# EAGLE board i2c_lcd_v2 (EAGLE 5.10)
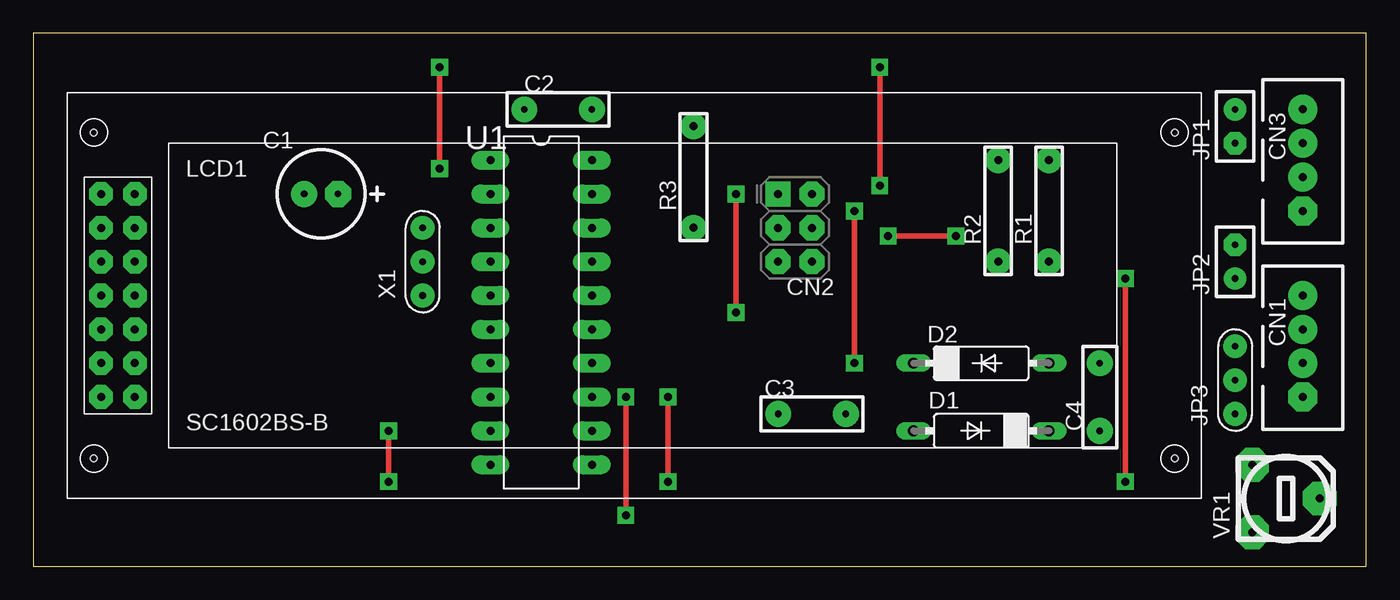
[diagram p0: board, top side]
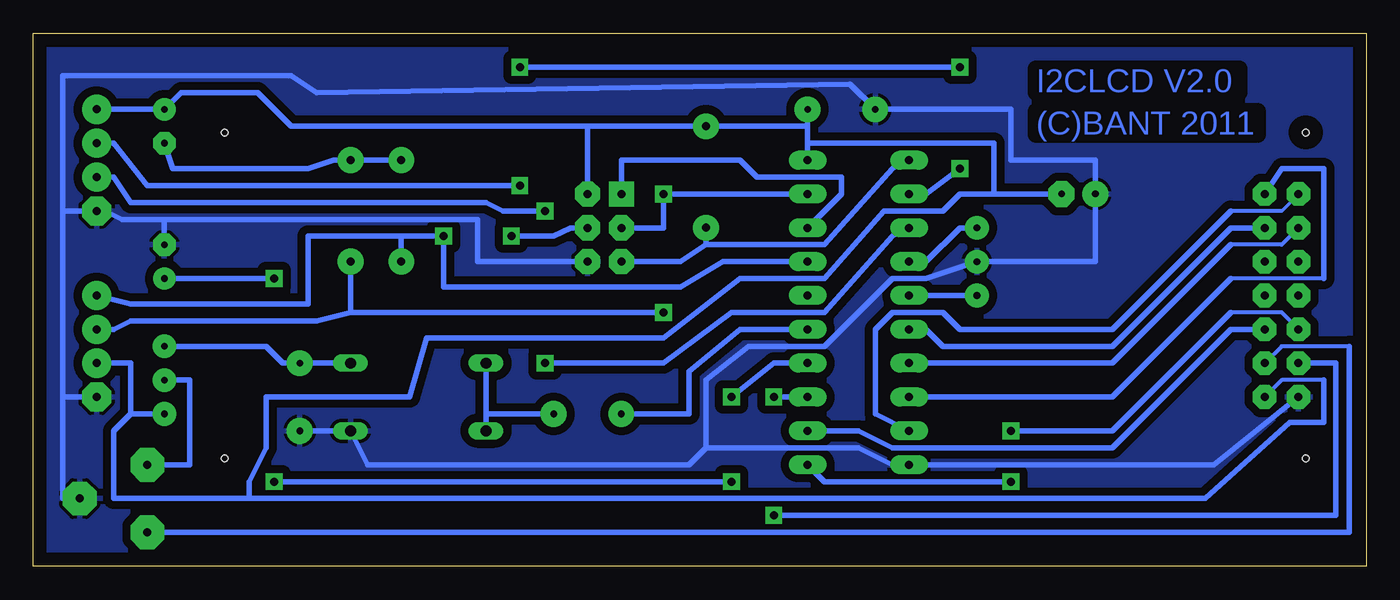
[diagram p1: board, bottom side, seen from below]

Size 100 x 40 mm. Coordinates in mm from the lower left corner, seen from the top.
Outline: 0,0 100,0 100,40 0,40 0,0
Copper layers (1*16): Top 0.035mm / dielectric 1.5mm / Bottom 0.035mm
Design rules "default": minimum track width 10mil, minimum drill 24mil, track to track 8mil, track to pad 8mil, pad to pad 8mil, via to via 8mil, smd to smd 8mil, copper to edge 40mil, drill to drill 8mil, minimum pad ring 10mil, minimum via ring 8mil, stop-mask expansion 4mil, vias tented up to drill 0mil, thermal gap 10mil

## Footprints (pad centres in the part's own frame; a part is rotated, then mirrored left to right if it is on the bottom)
CCAP_6.5 = drill 0.5 pad 1.93 octagon: + -1.27,0 | drill 0.5 pad 1.93 round: - 1.27,0
CAP_DIP_2 = drill 0.5 pad 1.93 round: 1 -2.54,0; 2 2.54,0
CON_HRS_DIP_4 = drill 0.6 pad 2.184 octagon: 1 -3.81,0 | drill 0.6 pad 2.184 round: 2 -1.27,0; 3 1.27,0; 4 3.81,0
2X3-NS = drill 0.6 pad 1.88 square: 1 -2.54,-1.27 | drill 0.6 pad 1.88 octagon: 2 -2.54,1.27; 3 0,-1.27; 4 0,1.27; 5 2.54,-1.27; 6 2.54,1.27
DO07 = drill 0.813 long: A 5.08,0; C -5.08,0
CON_PINHEAD_2 = drill 0.5 pad 1.676 octagon: 1 -1.27,0 | drill 0.5 pad 1.676 round: 2 1.27,0
CSTLS = drill 0.5 pad 1.778 round: 1 -2.54,0; 2 0,0; 3 2.54,0
SC1602 = drill 0.6 pad 1.778 octagon: DB0 -35.56,0; DB1 -38.1,0; DB2 -35.56,2.54; DB3 -38.1,2.54; DB4 -35.56,5.08; DB5 -38.1,5.08; DB6 -35.56,7.62; DB7 -38.1,7.62; E -38.1,-2.54; R/W -35.56,-2.54; RS -38.1,-5.08; VDD -35.56,-7.62; VO -35.56,-5.08; VSS -38.1,-7.62 | hole 0.5: -38.64,-12.24; -38.64,12.24; 42.45,12.24; 42.45,-12.24
R_0.125W_3 = drill 0.6 pad 1.93 round: 1 -3.81,0; 2 3.81,0
DIL20 = drill 0.6 pad 1.422 long: 1 -11.43,-3.81; 2 -8.89,-3.81; 3 -6.35,-3.81; 4 -3.81,-3.81; 5 -1.27,-3.81; 6 1.27,-3.81; 7 3.81,-3.81; 8 6.35,-3.81; 9 8.89,-3.81; 10 11.43,-3.81; 11 11.43,3.81; 12 8.89,3.81; 13 6.35,3.81; 14 3.81,3.81; 15 1.27,3.81; 16 -1.27,3.81; 17 -3.81,3.81; 18 -6.35,3.81; 19 -8.89,3.81; 20 -11.43,3.81
POT_MIDDLE = drill 0.6 pad 2.54 octagon: P$1 -2.54,-2.54; P$2 0,2.54; P$3 2.54,-2.54

## Placement (x,y rotation side)
C1  10uF  [CCAP_6.5]  21.59,27.94 180 top
C2  0.1uF  [CAP_DIP_2]  39.37,34.29 0 top
C3  0.1uF  [CAP_DIP_2]  58.42,11.43 180 top
C4  0.1uF  [CAP_DIP_2]  80.01,12.7 90 top
CN1  I2C  [CON_HRS_DIP_4]  95.25,16.51 90 top
CN2  AVR-ISP-6NS  [2X3-NS]  57.15,25.4 270 top
CN3  TTL  [CON_HRS_DIP_4]  95.25,30.48 90 top
D1  1S2076A  [DO07]  71.12,10.16 180 top
D2  1S2076A  [DO07]  71.12,15.24 0 top
JP1  [CON_PINHEAD_2]  90.17,33.02 90 top
JP2  [CON_PINHEAD_2]  90.17,22.86 270 top
JP3  [CSTLS]  90.17,13.97 90 top
LCD1  SC1602BS-B  [SC1602]  43.18,20.32 0 top
R1  10K  [R_0.125W_3]  76.2,26.67 90 top
R2  10K  [R_0.125W_3]  72.39,26.67 90 top
R3  10K  [R_0.125W_3]  49.53,29.21 90 top
U1  ATTINY2313  [DIL20]  38.1,19.05 270 top
VR1  10K  [POT_MIDDLE]  93.98,5.08 270 top
X1  8MHz  [CSTLS]  29.21,22.86 90 top

## Library data of the parts
C1-C4 CN1 CN3 JP1-JP3 R1-R3 VR1 X1 = MyLib
CN2 U1 = atmel
D1 D2 = diode
LCD1 = blank

## Nets
GND: C1.- C2.1 C4.1 CN1.1 CN2.6 CN3.1 D1.C JP2.1 LCD1.VSS U1.10 VR1.P$2 X1.2
N$1: LCD1.DB4 U1.6
N$2: LCD1.DB5 U1.7
N$3: LCD1.DB6 U1.8
N$4: LCD1.DB7 U1.9
N$5: LCD1.E U1.11
N$6: LCD1.R/W U1.12
N$7: LCD1.RS U1.13
N$8: CN2.5 R3.1 U1.1
N$9: CN1.3 CN2.3 R1.1 U1.19
N$10: CN1.4 CN2.4 R2.1 U1.17
N$11: JP1.1 R1.2 R2.2
N$12: LCD1.VO VR1.P$3
N$13: CN3.2 U1.3
N$14: CN3.3 U1.2
N$15: CN2.1 U1.18
N$16: JP2.2 U1.14
N$17: U1.4 X1.3
N$18: U1.5 X1.1
N$19: C3.1 D1.A D2.C
N$20: C4.2 D2.A JP3.3
N$21: C3.2 U1.15
N$22: JP3.2 VR1.P$1
VCC: C1.+ C2.2 CN1.2 CN2.2 CN3.4 JP1.2 JP3.1 LCD1.VDD R3.2 U1.20

## Tracks (layer width: path | path; a pad name or v marks a point on that pad's centre or on a via)
GND
  Bottom 0.406: 90.17,26.04 93.34,26.04 94.61,26.67 CN3.1 97.79,26.67 | C4.1 D1.C 74.93,7.62 50.8,7.62 49.53,8.89 | LCD1.VSS 11.43,7.62 U1.10 35.56,7.62 38.1,8.89 49.53,8.89 | 97.79,26.67 97.79,36.83 80.64,36.83 78.74,35.56 38.73,36.2 C2.1 26.67,34.29 26.67,30.48 20.32,30.48 C1.- 20.32,22.86 X1.2 33.02,21.59 35.56,21.59 40.64,16.51 46.35,16.51 49.53,13.97 49.53,8.89 | 97.79,26.67 97.79,12.7 | 97.79,12.7 97.79,5.08 VR1.P$2 | 97.79,12.7 CN1.1 | 90.17,26.04 JP2.1 | CN2.6 66.67,22.86 66.67,26.04 90.17,26.04
  pour Bottom (isolate 0.61): 0,39.37 0,0 100.33,0 100.33,40.64 0,40.64
N$1
  Bottom 0.406: U1.6 33.02,17.78 31.75,16.51 19.05,16.51 10.16,25.4 LCD1.DB4
N$2
  Bottom 0.305: 10.16,24.13 6.35,24.13 LCD1.DB5
  Bottom 0.406: U1.7 19.05,15.24 10.16,24.13
N$3
  Bottom 0.305: 3.17,21.59 10.16,21.59
  Bottom 0.406: U1.8 19.05,12.7 10.16,21.59 | 3.17,21.59 3.17,29.84 6.35,29.84 LCD1.DB6
N$4
  Bottom 0.254: 6.35,26.67 LCD1.DB7
  Bottom 0.305: 6.35,26.67 10.16,26.67
  Bottom 0.406: U1.9 36.83,11.43 36.83,17.78 35.56,19.05 31.75,19.05 30.48,17.78 19.05,17.78 10.16,26.67
N$5  (via drill 0.6 pad 1.27)
  Top 0.406: v26.67,10.16 v26.67,6.35
  Bottom 0.305: LCD1.E 6.35,19.05 10.16,19.05
  Bottom 0.406: 10.16,19.05 19.05,10.16 v26.67,10.16 | v26.67,6.35 40.64,6.35 U1.11
N$6
  Bottom 0.406: U1.12 38.1,10.16 35.56,8.89 19.05,8.89 10.16,17.78 LCD1.R/W
N$7  (via drill 0.6 pad 1.27)
  Top 0.406: v44.45,3.81 v44.45,12.7
  Bottom 0.406: LCD1.RS 2.29,15.24 2.29,3.81 v44.45,3.81 | v44.45,12.7 U1.13
N$8
  Bottom 0.406: U1.1 35.56,29.84 40.64,24.13 49.53,24.13 | 49.53,24.13 R3.1 | CN2.5 51.44,22.86 49.53,24.13
N$9  (via drill 0.6 pad 1.27)
  Top 0.406: v52.7,27.94 v52.7,19.05
  Bottom 0.406: U1.19 v52.7,27.94 52.7,25.4 CN2.3 | 76.2,19.05 78.74,18.41 92.71,18.41 93.98,17.78 CN1.3 | 76.2,19.05 R1.1 | v52.7,19.05 76.2,19.05
N$10  (via drill 0.6 pad 1.27)
  Top 0.406: v69.22,24.77 v64.14,24.77
  Bottom 0.406: U1.17 48.26,22.86 51.44,20.95 69.22,20.95 v69.22,24.77 72.39,24.77 | CN1.4 92.71,19.68 79.38,19.68 79.38,24.77 72.39,24.77 | 72.39,24.77 R2.1 | v64.14,24.77 60.96,24.77 59.69,25.4 CN2.4
N$11
  Bottom 0.406: JP1.1 89.53,29.84 79.38,29.84 77.47,30.48 R1.2 R2.2
N$12
  Bottom 0.305: LCD1.VO 6.35,16.51 1.27,16.51
  Bottom 0.406: 1.27,16.51 1.27,2.54 VR1.P$3
N$13  (via drill 0.6 pad 1.27)
  Top 0.406: v61.59,15.24 v61.59,26.67
  Bottom 0.406: CN3.2 93.98,29.21 92.71,27.3 66.04,27.3 64.77,26.67 v61.59,26.67 | v61.59,15.24 52.7,15.24 47.62,19.05 40.64,19.05 35.56,24.77 U1.3
N$14  (via drill 0.6 pad 1.27)
  Top 0.406: v63.5,37.47 v63.5,28.57 | v30.48,29.84 v30.48,37.47
  Bottom 0.406: CN3.3 93.98,31.75 91.44,28.57 v63.5,28.57 | v30.48,37.47 v63.5,37.47 | v30.48,29.84 33.02,27.94 U1.2
N$15
  Bottom 0.406: U1.18 39.37,27.94 39.37,29.21 45.72,29.21 46.99,30.48 55.88,30.48 CN2.1
N$16  (via drill 0.6 pad 1.27)
  Top 0.406: v47.62,6.35 v47.62,12.7 | v81.92,6.35 v81.92,21.59
  Bottom 0.406: U1.14 44.45,15.24 v47.62,12.7 | v47.62,6.35 v81.92,6.35 | v81.92,21.59 JP2.2
N$17
  Bottom 0.406: U1.4 33.02,22.86 30.48,25.4 X1.3
N$18
  Bottom 0.406: X1.1 U1.5
N$19
  Bottom 0.406: 66.04,11.43 D1.A | 66.04,11.43 D2.C | C3.1 66.04,11.43
N$20
  Bottom 0.406: D2.A C4.2 81.28,15.24 82.55,16.51 JP3.3
N$21
  Bottom 0.406: U1.15 46.99,17.78 50.8,14.61 50.8,11.43 C3.2
N$22
  Bottom 0.406: JP3.2 88.27,13.97 88.27,7.62 VR1.P$1
VCC
  Bottom 0.305: LCD1.VDD 6.35,13.97 3.17,13.97
  Bottom 0.406: CN3.4 JP1.2 88.9,35.56 83.19,35.56 80.64,33.02 58.42,33.02 | 3.17,13.97 3.17,10.79 5.71,10.79 12.06,5.08 83.82,5.08 | 83.82,5.08 83.82,6.35 82.55,8.89 82.55,12.7 71.75,12.7 70.48,17.14 52.7,17.14 46.99,21.59 40.64,21.59 36.2,26.67 31.75,26.67 30.48,27.94 27.94,27.94 | 58.42,33.02 CN2.2 | 41.91,31.75 U1.20 | 41.91,31.75 41.91,33.02 | 41.91,33.02 C2.2 | CN1.2 92.71,15.24 92.71,11.43 | 92.71,11.43 93.98,10.16 93.98,5.08 83.82,5.08 | 92.71,11.43 JP3.1 | 58.42,33.02 R3.2 41.91,33.02 | 41.91,31.75 27.94,31.75 27.94,27.94 | 27.94,27.94 C1.+

## Text on the board
Bottom: I2CLCD V2.0 | (C)BANT 2011